# EAGLE board DigitalSandbox-Panel-v10 (EAGLE 6.5.0)
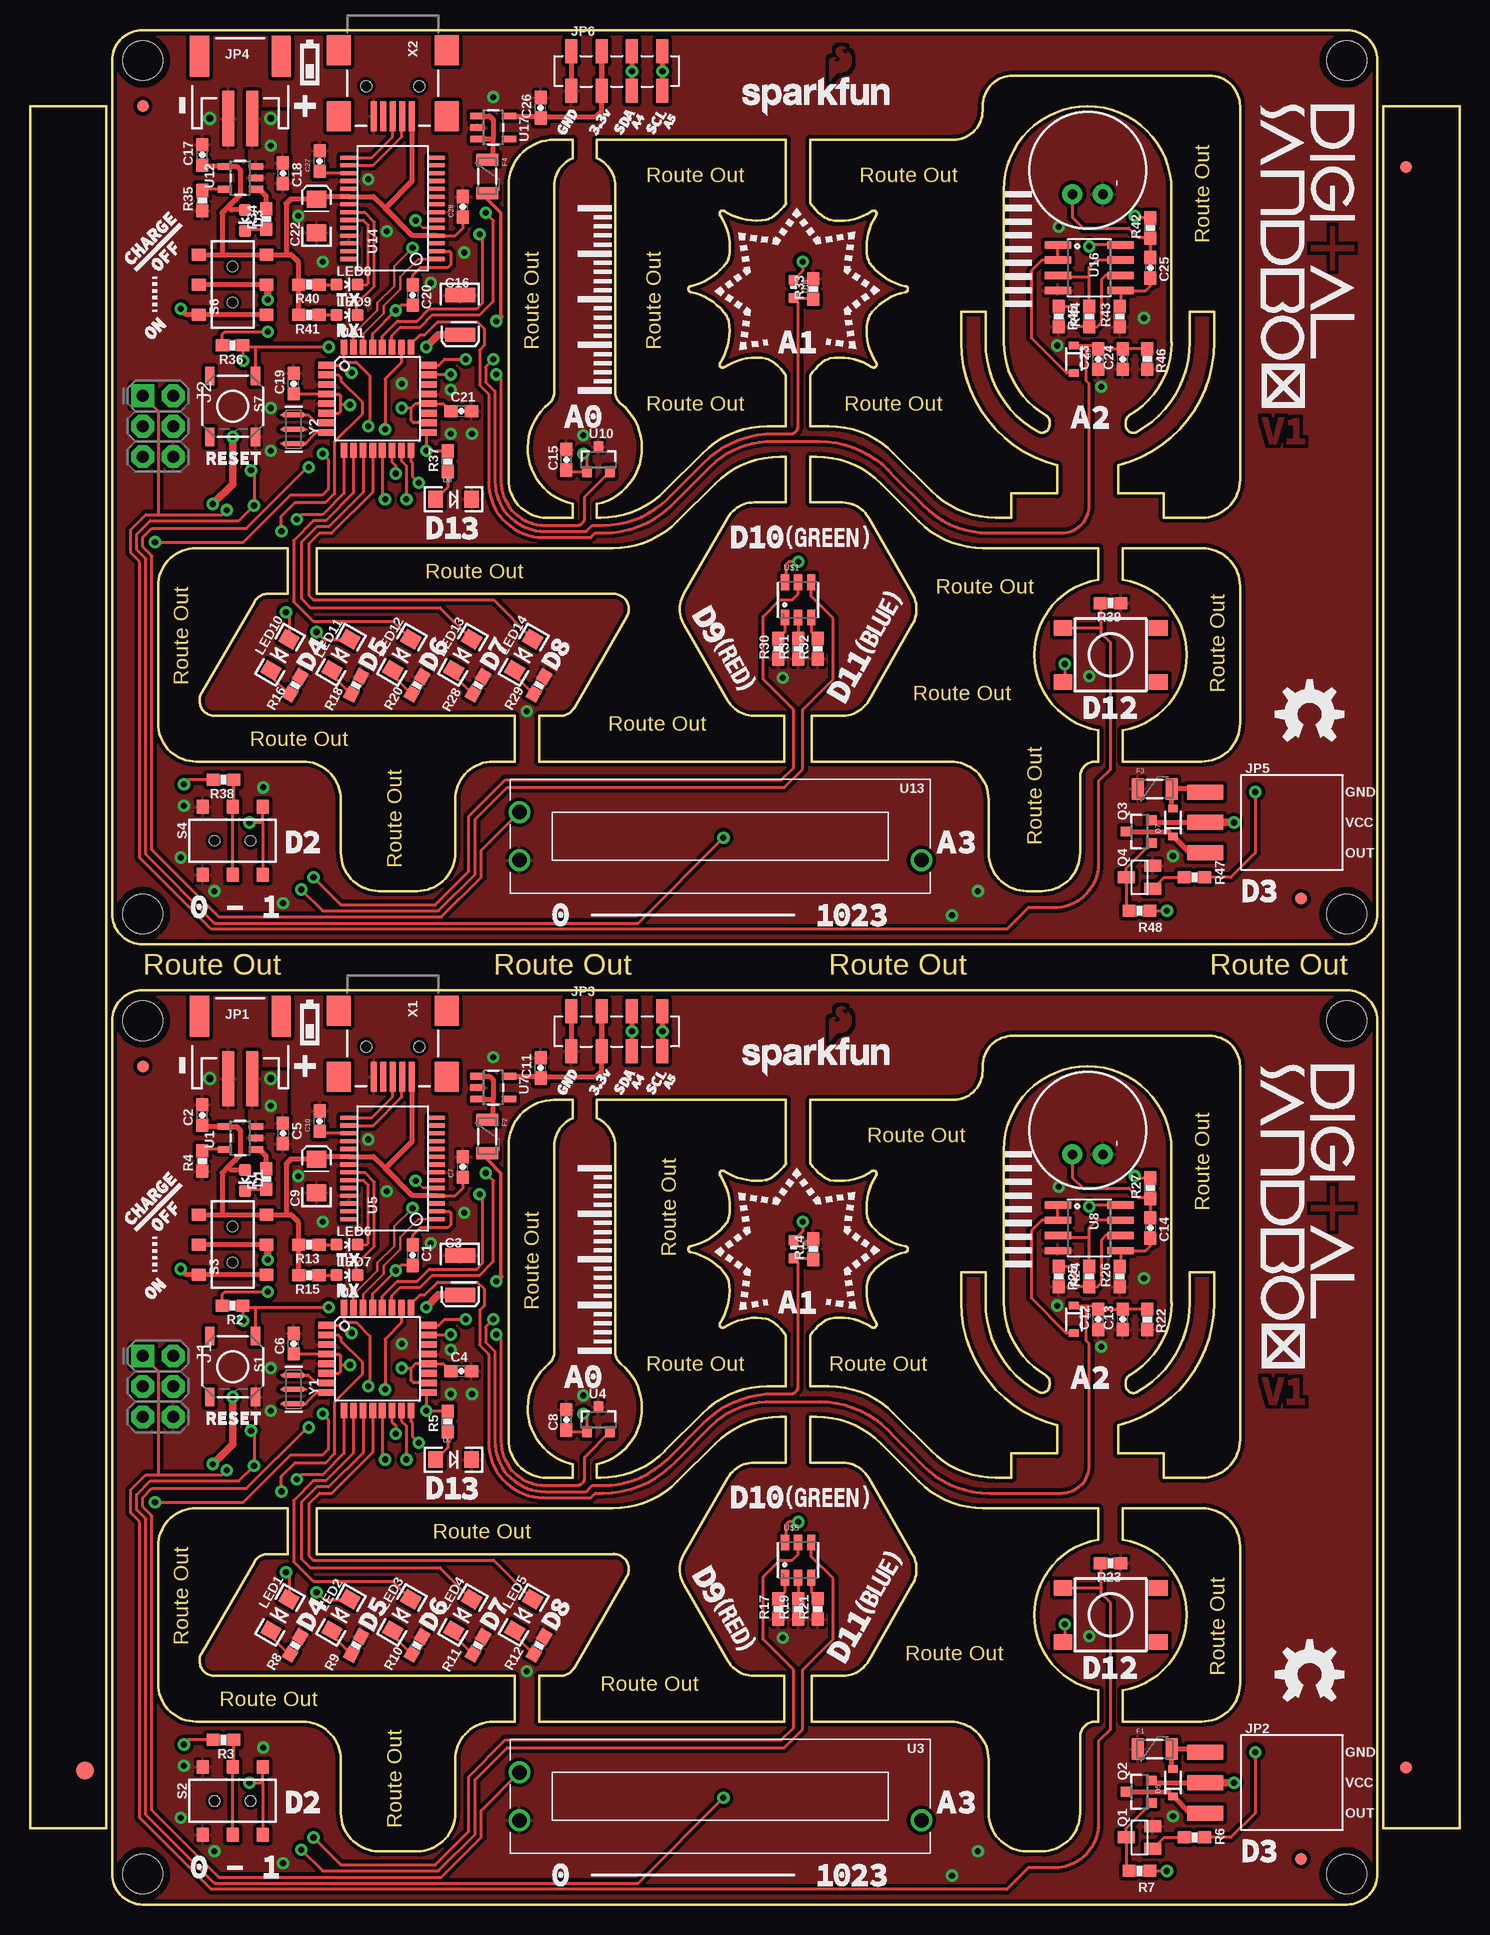
[diagram p0: board, top side]
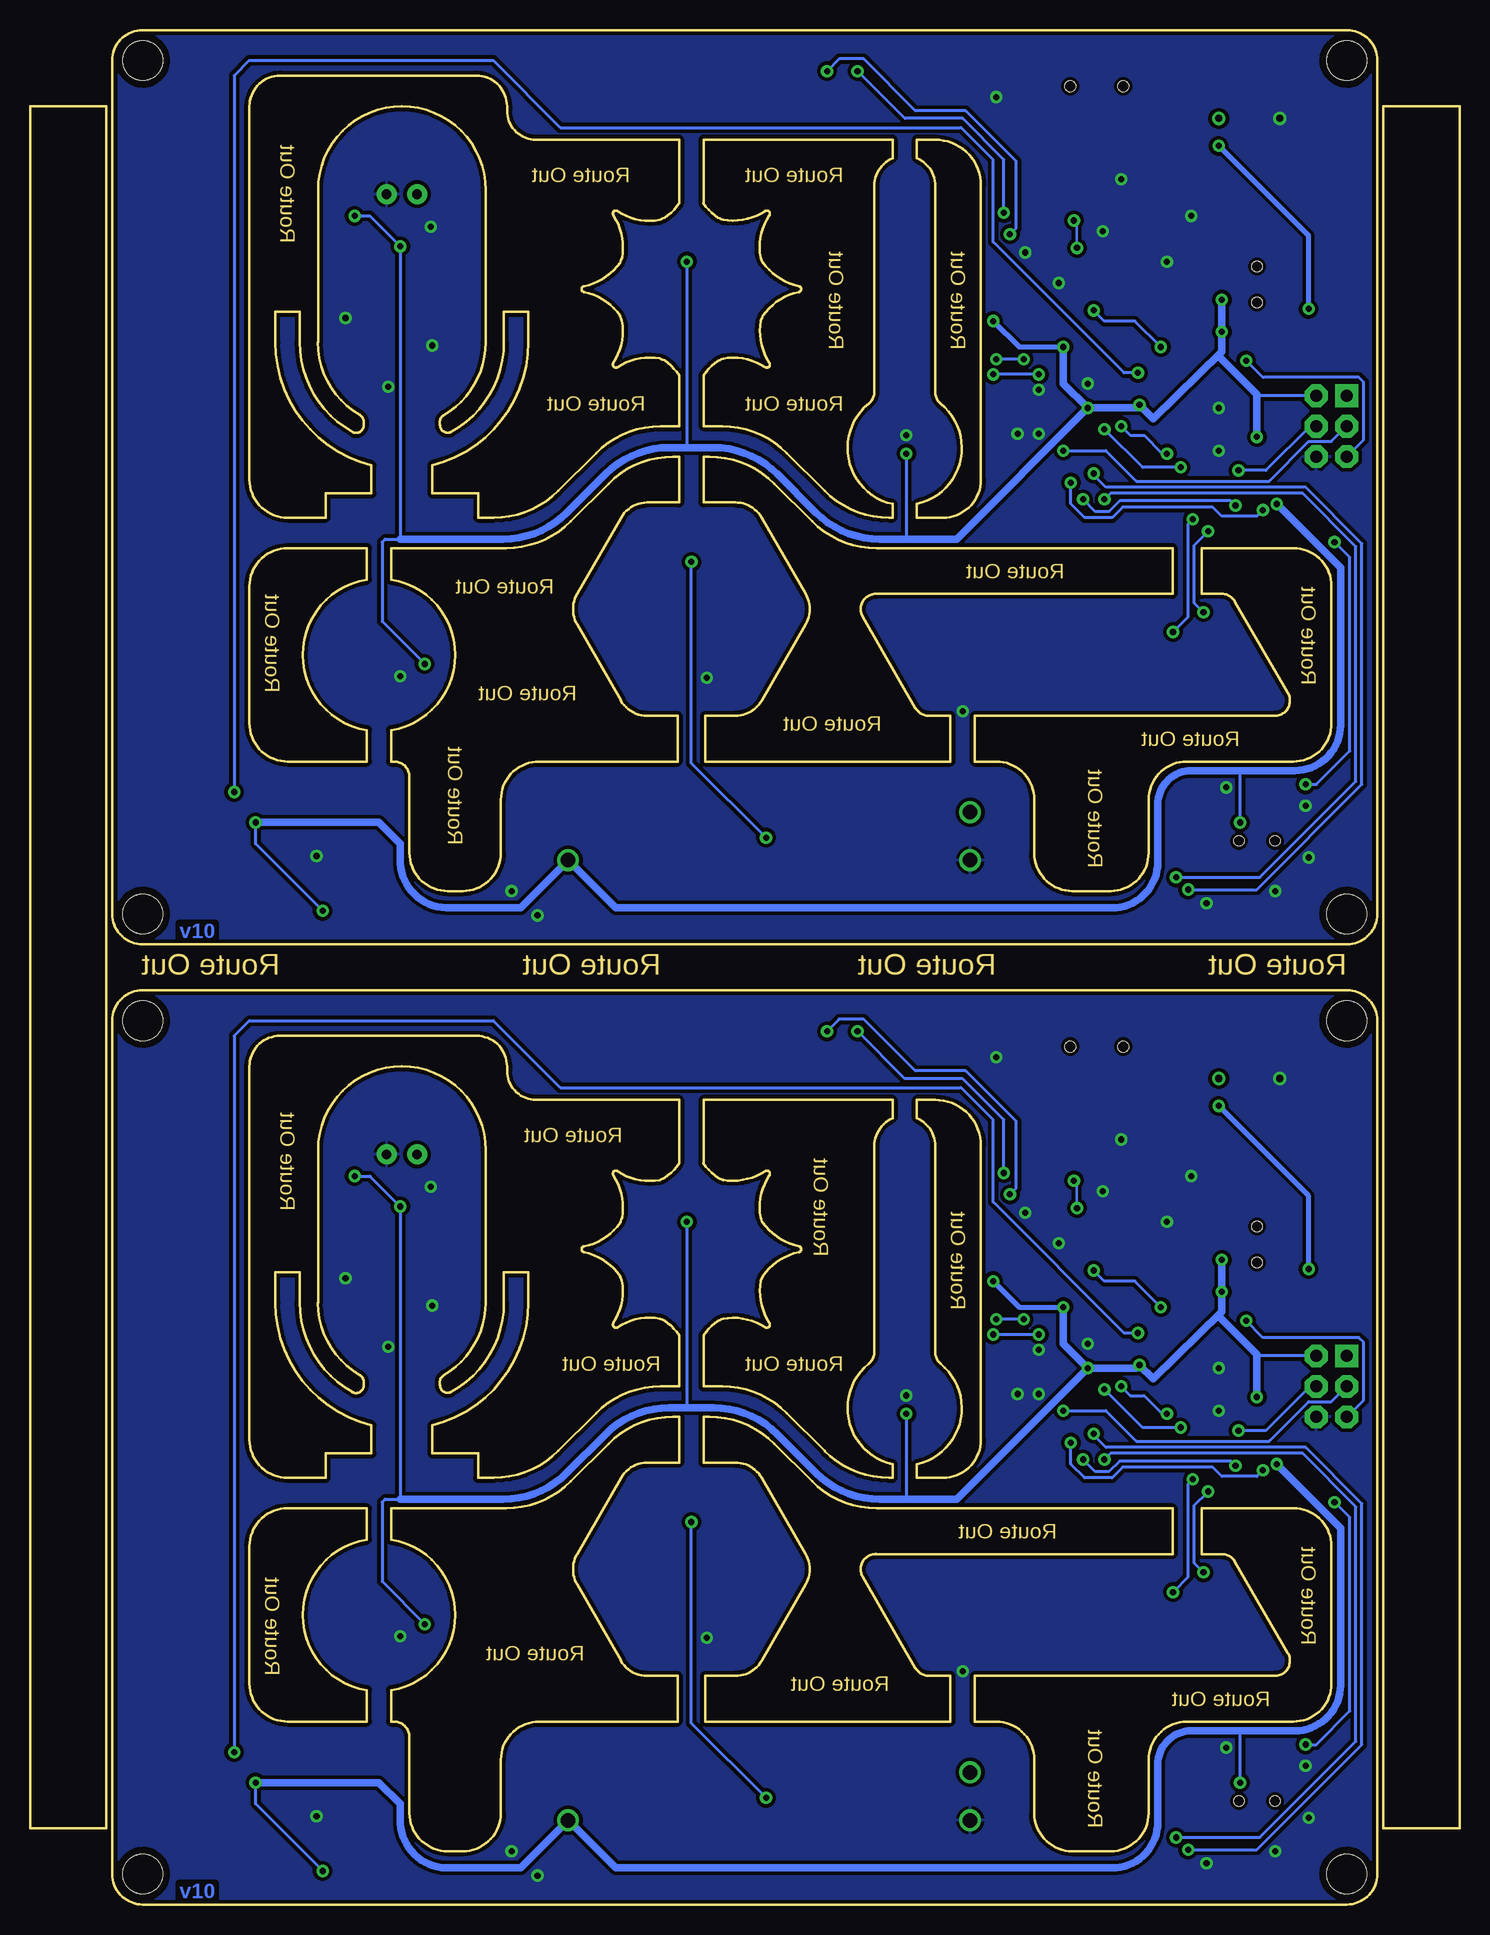
[diagram p1: board, bottom side, seen from below]

Size 119.13 x 156.21 mm. Coordinates in mm from the lower left corner, seen from the top.
Outline: 372 segments
Copper layers (1*16): Top 0.035mm / dielectric 1.5mm / Bottom 0.035mm
Design rules "SparkFun-2-layer": minimum track width 7mil, minimum drill 15mil, track to track 8mil, track to pad 8mil, pad to pad 8mil, via to via 8mil, smd to smd 8mil, copper to edge 8mil, drill to drill 8mil, minimum pad ring 12mil, minimum via ring 10mil, stop-mask expansion 4mil, vias tented up to drill 20mil, thermal gap 10mil
Net classes: 0 default: width 0.203 mm; 1 power: width 0.254 mm

## Footprints (pad centres in the part's own frame; a part is rotated, then mirrored left to right if it is on the bottom)
0603-CAP = smd 1.1 x 1: 1 -0.85,0; 2 0.85,0
EIA3528 = smd 1.2 x 2.5: A 1.65,0; C -1.65,0
EIA3216 = smd 1.4 x 1.6: A 1.4,0; C -1.4,0
LED-0603 = smd 1 x 1: A 0,-0.877; C 0,0.877
LED-1206 = smd 1.2 x 1.4: A -1.5,0; C 1.5,0
SOD-323 = smd 0.63 x 0.83: A 1.15,0; C -1.15,0
FIDUCIAL-1.5X3 = smd 1.5 x 1.5: 1 0,0
FIDUCIAL-1X2 = smd 1 x 1: 1 0,0
PTC-1206 = smd 1 x 1.8: 1 -1.4,0; 2 1.4,0
2X3-NS = drill 1.016 pad 1.88 square: 1 -2.54,-1.27 | drill 1.016 pad 1.88 octagon: 2 -2.54,1.27; 3 0,-1.27; 4 0,1.27; 5 2.54,-1.27; 6 2.54,1.27
JST-2-SMD = smd 1 x 4.6: 1 -1,-3.7; 2 1,-3.7 | smd 1.6 x 3.4: NC1 -3.4,1.5; NC2 3.4,1.5
1X03_SMD_RA_FEMALE = smd 1.25 x 3: 1 -2.54,7.225; 2 0,7.225; 3 2.54,7.225
1X04_SMD_STRAIGHT_COMBO = smd 1 x 2: 1 0,-1.65; 1-2 0,1.65; 2 2.54,1.65; 2-2 2.54,-1.65; 3 5.08,-1.65; 3-2 5.08,1.65; 4 7.62,1.65; 4-2 7.62,-1.65
SOT23 = smd 1 x 1.4: 1 -0.95,-1.1; 2 0.95,-1.1; 3 0,1.1
SOT23-3 = smd 0.8 x 0.9: 1 -0.95,-1; 2 0.95,-1; 3 0,1.1
0603-RES = smd 1.1 x 1: 1 -0.85,0; 2 0.85,0
TACTILE_SWITCH_SMD = smd 1.524 x 0.762: 1 -2.54,1.905; 2 2.54,1.905; 3 -2.54,-1.905; 4 2.54,-1.905
AYZ0202 = smd 1 x 1.15: 1 -2.5,2.825; 2 0,2.825; 3 2.5,2.825; 4 -2.5,-2.825; 5 0,-2.825; 6 2.5,-2.825 | hole 0.85: 1.5,0; -1.5,0
TACTILE_SWITCH_TALL = smd 1.55 x 1.3: A1 -3.975,-2.25; A2 3.975,-2.25; B1 -3.975,2.25; B2 3.975,2.25
STAND-OFF = hole 3.302: 0,0
SOT23-5 = smd 0.55 x 1.2: 1 -0.95,-1.3; 2 0,-1.3; 3 0.95,-1.3; 4 0.95,1.3; 5 -0.95,1.3
TQFP32-08 = smd 1.27 x 0.559: 1 -4.293,2.8; 2 -4.293,2; 3 -4.293,1.2; 4 -4.293,0.4; 5 -4.293,-0.4; 6 -4.293,-1.2; 7 -4.293,-2; 8 -4.293,-2.8; 17 4.293,-2.8; 18 4.293,-2; 19 4.293,-1.2; 20 4.293,-0.4; 21 4.293,0.4; 22 4.293,1.2; 23 4.293,2; 24 4.293,2.8 | smd 0.559 x 1.27: 9 -2.8,-4.293; 10 -2,-4.293; 11 -1.2,-4.293; 12 -0.4,-4.293; 13 0.4,-4.293; 14 1.2,-4.293; 15 2,-4.293; 16 2.8,-4.293; 25 2.8,4.293; 26 2,4.293; 27 1.2,4.293; 28 0.4,4.293; 29 -0.4,4.293; 30 -1.2,4.293; 31 -2,4.293; 32 -2.8,4.293
C2031N-1A2-B10K-GP = drill 1.2: 1 -16.75,2; 2 -16.75,-2; 3 16.75,-2
SSOP28DB = smd 0.348 x 1.397: 1 -4.225,-3.656; 2 -3.575,-3.656; 3 -2.925,-3.656; 4 -2.275,-3.656; 5 -1.625,-3.656; 6 -0.975,-3.656; 7 -0.325,-3.656; 8 0.325,-3.656; 9 0.975,-3.656; 10 1.625,-3.656; 11 2.275,-3.656; 12 2.925,-3.656; 13 3.575,-3.656; 14 4.225,-3.656; 15 4.225,3.656; 16 3.575,3.656; 17 2.925,3.656; 18 2.275,3.656; 19 1.625,3.656; 20 0.975,3.656; 21 0.325,3.656; 22 -0.325,3.656; 23 -0.975,3.656; 24 -1.625,3.656; 25 -2.275,3.656; 26 -2.925,3.656; 27 -3.575,3.656; 28 -4.225,3.656
ALS-PT19 = smd 0.8 x 0.8: C -0.75,0; E 0.75,0
SO08 = smd 0.61 x 2.21: 1 -1.905,-2.616; 2 -0.635,-2.616; 3 0.635,-2.616; 4 1.905,-2.616; 5 1.905,2.616; 6 0.635,2.616; 7 -0.635,2.616; 8 -1.905,2.616
MIC-9.7MM = drill 0.8 pad 1.676: 1 -2,1.27; 2 -2,-1.27
PLCC-6-LED = smd 0.7 x 1.3: AB -1.1,1.475; AG 1.1,1.475; AR 0,1.475; CB -1.1,-1.475; CG 1.1,-1.475; CR 0,-1.475
USB-MINIB = smd 2.5 x 0.5: D+ 2.5,0; D- 2.5,0.8; GND 2.5,-1.6; ID 2.5,-0.8; VBUS 2.5,1.6 | smd 2.5 x 2: MTN1 -3,4.5; MTN2 2.5,4.5; MTN3 -3,-4.5; MTN4 2.5,-4.5 | hole 0.9: 0,2.2; 0,-2.2
RESONATOR-SMD = smd 0.45 x 1.905: 1 -1.2,0; 2 0,0; 3 1.2,0

## Placement (x,y rotation side)
C1  0.1uF  [0603-CAP]  31.88,54.1 270 top
C2  4.7uF  [0603-CAP]  14.35,65.79 90 top
C3  47uF  [EIA3528]  35.85,52.45 270 top
C4  1.0uF  [0603-CAP]  35.94,44.45 0 top
C5  4.7uF  [0603-CAP]  21.08,64.26 270 top
C6  0.1uF  [0603-CAP]  21.97,46.74 90 top
C7  0.1uF  [0603-CAP]  36.07,61.47 90 top
C8  0.1uF  [0603-CAP]  44.7,40.39 90 top
C9  10uF  [EIA3216]  23.88,60.71 90 top
C10  0.1uF  [0603-CAP]  24.13,65.28 90 top
C11  0.1uF  [0603-CAP]  42.54,69.72 90 top
C12  0.1uF  [0603-CAP]  89.03,48.77 90 top
C13  0.1uF  [0603-CAP]  91.06,48.77 90 top
C14  0.1uF  [0603-CAP]  93.34,56.39 270 top
C15  0.1uF  [0603-CAP]  44.7,120.4 90 top
C16  47uF  [EIA3528]  35.85,132.46 270 top
C17  4.7uF  [0603-CAP]  14.35,145.8 90 top
C18  4.7uF  [0603-CAP]  21.08,144.27 270 top
C19  0.1uF  [0603-CAP]  21.97,126.75 90 top
C20  0.1uF  [0603-CAP]  31.88,134.11 270 top
C21  1.0uF  [0603-CAP]  35.94,124.46 0 top
C22  10uF  [EIA3216]  23.88,140.72 90 top
C23  0.1uF  [0603-CAP]  89.03,128.78 90 top
C24  0.1uF  [0603-CAP]  91.06,128.78 90 top
C25  0.1uF  [0603-CAP]  93.34,136.4 270 top
C26  0.1uF  [0603-CAP]  42.54,149.73 90 top
C27  0.1uF  [0603-CAP]  24.13,145.29 90 top
C28  0.1uF  [0603-CAP]  36.07,141.48 90 top
D1  Yellow  [LED-0603]  17.91,60.33 180 top
D2  RED  [LED-1206]  35.31,37.08 0 top
D3  Yellow  [LED-0603]  17.91,140.34 180 top
D4  [SOD-323]  87,48.77 270 top
D5  [SOD-323]  95.25,10.16 90 top
D6  [SOD-323]  87,128.78 270 top
D7  [SOD-323]  95.25,90.17 90 top
D8  RED  [LED-1206]  35.31,117.09 0 top
E$1  [FIDUCIAL-1.5X3]  4.57,11.18 0 top
E$2  [FIDUCIAL-1X2]  114.68,11.43 0 top
E$4  [FIDUCIAL-1X2]  114.68,144.78 180 top
F1  PTCSMD  [PTC-1206]  93.73,12.95 0 top
F2  PTCSMD  [PTC-1206]  38.1,64.01 270 top
F3  PTCSMD  [PTC-1206]  93.73,92.96 0 top
F4  PTCSMD  [PTC-1206]  38.1,144.02 270 top
FID1  FIDUCIAL1X2  [FIDUCIAL-1X2]  105.92,3.81 0 top
FID2  FIDUCIAL1X2  [FIDUCIAL-1X2]  9.4,69.85 0 top
FID3  FIDUCIAL1X2  [FIDUCIAL-1X2]  105.92,83.82 0 top
FID4  FIDUCIAL1X2  [FIDUCIAL-1X2]  9.4,149.86 0 top
J1  AVR_SPI_PRG_6NS  [2X3-NS]  10.67,43.18 270 top
J2  AVR_SPI_PRG_6NS  [2X3-NS]  10.67,123.19 270 top
JP1  LiPo  [JST-2-SMD]  17.53,72.52 0 top
JP2  [1X03_SMD_RA_FEMALE]  105.16,10.16 90 top
JP3  [1X04_SMD_STRAIGHT_COMBO]  45.08,72.77 0 top
JP4  LiPo  [JST-2-SMD]  17.53,152.53 0 top
JP5  [1X03_SMD_RA_FEMALE]  105.16,90.17 90 top
JP6  [1X04_SMD_STRAIGHT_COMBO]  45.08,152.78 0 top
LED1  White  [LED-1206]  20.83,24.13 240 top
LED2  White  [LED-1206]  25.91,24.13 240 top
LED3  White  [LED-1206]  30.99,24.13 240 top
LED4  White  [LED-1206]  36.07,24.13 240 top
LED5  White  [LED-1206]  41.15,24.13 240 top
LED6  Red  [LED-0603]  26.42,54.99 270 top
LED7  Green  [LED-0603]  26.42,52.45 270 top
LED8  Red  [LED-0603]  26.42,135 270 top
LED9  Green  [LED-0603]  26.42,132.46 270 top
LED10  White  [LED-1206]  20.83,104.14 240 top
LED11  White  [LED-1206]  25.91,104.14 240 top
LED12  White  [LED-1206]  30.99,104.14 240 top
LED13  White  [LED-1206]  36.07,104.14 240 top
LED14  White  [LED-1206]  41.15,104.14 240 top
Q1  MOSFET-N  [SOT23]  92.46,5.59 90 top
Q2  MOSFET-P  [SOT23-3]  92.46,9.4 90 top
Q3  MOSFET-P  [SOT23-3]  92.46,89.41 90 top
Q4  MOSFET-N  [SOT23]  92.46,85.6 90 top
R1  330  [0603-RES]  19.68,60.45 90 top
R2  10k  [0603-RES]  16.89,49.91 180 top
R3  10k  [0603-RES]  16.13,13.72 180 top
R4  10k  [0603-RES]  14.35,61.98 90 top
R5  330  [0603-RES]  34.8,40.26 90 top
R6  1k  [0603-RES]  97.03,5.59 0 top
R7  1k  [0603-RES]  92.46,2.79 180 top
R8  300  [0603-RES]  22.1,21.59 60 top
R9  300  [0603-RES]  27.18,21.59 62 top
R10  300  [0603-RES]  32.26,21.59 60 top
R11  300  [0603-RES]  37.34,21.59 60 top
R12  300  [0603-RES]  42.42,21.59 60 top
R13  1k  [0603-RES]  23.24,54.99 180 top
R14  10k  [0603-RES]  65.28,54.61 90 top
R15  1k  [0603-RES]  23.24,52.45 180 top
R16  300  [0603-RES]  22.1,101.6 60 top
R17  300  [0603-RES]  62.36,24.64 90 top
R18  300  [0603-RES]  27.18,101.6 62 top
R19  100  [0603-RES]  64.01,24.64 90 top
R20  300  [0603-RES]  32.26,101.6 60 top
R21  100  [0603-RES]  65.66,24.64 90 top
R22  100k  [0603-RES]  93.09,48.77 270 top
R23  10k  [0603-RES]  90.04,28.45 180 top
R24  10k  [0603-RES]  88.27,52.32 90 top
R25  2.2k  [0603-RES]  85.73,52.32 270 top
R26  10k  [0603-RES]  90.81,52.32 90 top
R27  10k  [0603-RES]  93.34,59.69 90 top
R28  300  [0603-RES]  37.34,101.6 60 top
R29  300  [0603-RES]  42.42,101.6 60 top
R30  300  [0603-RES]  62.36,104.65 90 top
R31  100  [0603-RES]  64.01,104.65 90 top
R32  100  [0603-RES]  65.66,104.65 90 top
R33  10k  [0603-RES]  65.28,134.62 90 top
R34  330  [0603-RES]  19.68,140.46 90 top
R35  10k  [0603-RES]  14.35,141.99 90 top
R36  10k  [0603-RES]  16.89,129.92 180 top
R37  330  [0603-RES]  34.8,120.27 90 top
R38  10k  [0603-RES]  16.13,93.73 180 top
R39  10k  [0603-RES]  90.04,108.46 180 top
R40  1k  [0603-RES]  23.24,135 180 top
R41  1k  [0603-RES]  23.24,132.46 180 top
R42  10k  [0603-RES]  93.34,139.7 90 top
R43  10k  [0603-RES]  90.81,132.33 90 top
R44  10k  [0603-RES]  88.27,132.33 90 top
R45  2.2k  [0603-RES]  85.73,132.33 270 top
R46  100k  [0603-RES]  93.09,128.78 270 top
R47  1k  [0603-RES]  97.03,85.6 0 top
R48  1k  [0603-RES]  92.46,82.8 180 top
S1  Reset  [TACTILE_SWITCH_SMD]  16.89,44.83 270 top
S2  [AYZ0202]  16.89,8.64 0 top
S3  On/Off  [AYZ0202]  16.89,54.99 90 top
S4  [AYZ0202]  16.89,88.65 0 top
S5  SWITCH-MOMENTARY-2SMD-4  [TACTILE_SWITCH_TALL]  90.04,24.13 180 top
S6  On/Off  [AYZ0202]  16.89,135 90 top
S7  Reset  [TACTILE_SWITCH_SMD]  16.89,124.84 270 top
S8  SWITCH-MOMENTARY-2SMD-4  [TACTILE_SWITCH_TALL]  90.04,104.14 180 top
STANDOFF1  STAND-OFF  [STAND-OFF]  109.73,73.66 0 top
STANDOFF2  STAND-OFF  [STAND-OFF]  109.73,2.54 0 top
STANDOFF3  STAND-OFF  [STAND-OFF]  9.4,2.54 0 top
STANDOFF4  STAND-OFF  [STAND-OFF]  9.4,73.66 0 top
STANDOFF5  STAND-OFF  [STAND-OFF]  9.4,153.67 0 top
STANDOFF6  STAND-OFF  [STAND-OFF]  9.4,82.55 0 top
STANDOFF7  STAND-OFF  [STAND-OFF]  109.73,82.55 0 top
STANDOFF8  STAND-OFF  [STAND-OFF]  109.73,153.67 0 top
U1  MCP73831  [SOT23-5]  17.53,63.88 90 top
U2  ATMEGA328  [TQFP32-08]  28.96,45.47 0 top
U3  C2031N-1A2-B10K-GP  [C2031N-1A2-B10K-GP]  57.53,9.02 0 top
U4  MCP9700  [SOT23-3]  47.37,40.39 0 top
U5  FT232RLSSOP  [SSOP28DB]  30.23,61.34 90 top
U6  LIGHTSENSORALS  [ALS-PT19]  63.63,54.61 270 top
U7  V_REG_LDOSMD  [SOT23-5]  38.61,68.07 270 top
U8  LMV358SOIC  [SO08]  88.27,56.39 270 top
U9  MIC9.7MM  [MIC-9.7MM]  88.14,64.52 90 top
U10  MCP9700  [SOT23-3]  47.37,120.4 0 top
U11  ATMEGA328  [TQFP32-08]  28.96,125.48 0 top
U12  MCP73831  [SOT23-5]  17.53,143.89 90 top
U13  C2031N-1A2-B10K-GP  [C2031N-1A2-B10K-GP]  57.53,89.03 0 top
U14  FT232RLSSOP  [SSOP28DB]  30.23,141.35 90 top
U15  MIC9.7MM  [MIC-9.7MM]  88.14,144.53 90 top
U16  LMV358SOIC  [SO08]  88.27,136.4 270 top
U17  V_REG_LDOSMD  [SOT23-5]  38.61,148.08 270 top
U18  LIGHTSENSORALS  [ALS-PT19]  63.63,134.62 270 top
U$1  LED-TRICOLOR-SMDPLCC-6-SMD  [PLCC-6-LED]  64.01,108.71 0 top
U$5  LED-TRICOLOR-SMDPLCC-6-SMD  [PLCC-6-LED]  64.01,28.7 0 top
X1  USBSMD  [USB-MINIB]  30.23,71.5 270 top
X2  USBSMD  [USB-MINIB]  30.23,151.51 270 top
Y1  8MHz  [RESONATOR-SMD]  21.97,42.93 270 top
Y2  8MHz  [RESONATOR-SMD]  21.97,122.94 270 top

## Library data of the parts
C1 C6-C8 C10-C15 C19 C20 C23-C28 = SparkFun-Capacitors; PROD_ID: CAP-00810
C2 C5 C17 C18 = SparkFun-Capacitors; PROD_ID: CAP-08280
C3 C16 = SparkFun-Capacitors; PROD_ID: CAP-08310
C4 C21 JP1 JP4 U4 U10 = SparkFun
C9 C22 = SparkFun-Capacitors; PROD_ID: CAP-00811
D1 D3 = SparkFun-LED; PROD_ID: DIO-09003
D2 D8 = SparkFun-LED; PROD_ID: DIO-00809
D4-D7 = SparkFun-DiscreteSemi; PROD_ID: DIO-09646
E$1 = SparkFun-Retired
E$2 E$4 FID1-FID4 = SparkFun-Aesthetics
F1-F4 = SparkFun-PowerIC; PROD_ID: RES-11150
J1 J2 JP3 JP6 = SparkFun-Connectors
JP2 JP5 = SparkFun-Connectors; PROD_ID: CONN-10926; VALUE: 1x3 RA Female .1"
LED1-LED5 LED10-LED14 = SparkFun-LED; PROD_ID: DIO-09955; VALUE: WHITE
LED6 LED8 = SparkFun-LED; PROD_ID: DIO-00819; VALUE: RED
LED7 LED9 = SparkFun-LED; PROD_ID: DIO-00821; VALUE: GREEN
Q1 Q4 = SparkFun-DiscreteSemi; PROD_ID: TRANS-00830
Q2 Q3 = SparkFun-DiscreteSemi; PROD_ID: TRANS-08285
R1 R5 R34 R37 = SparkFun-Resistors; PROD_ID: RES-00818
R2-R4 R14 R23 R24 R26 R27 R33 R35 R36 R38 R39 R42-R44 = SparkFun-Resistors; PROD_ID: RES-00824; VALUE: 10K
R6 R7 R13 R15 R40 R41 R47 R48 = SparkFun-Resistors; PROD_ID: RES-07856; VALUE: 1K
R8-R12 R16-R18 R20 R28-R30 = SparkFun-Resistors; PROD_ID: RES_10328
R19 R21 R31 R32 = SparkFun-Resistors; PROD_ID: RES-07863
R22 R46 = SparkFun-Resistors; PROD_ID: RES-07828
R25 R45 = SparkFun-Resistors; PROD_ID: RES-08272
S1 S7 = SparkFun-Electromechanical; PROD_ID: SWCH-08247
S2-S4 S6 = SparkFun-Electromechanical; PROD_ID: SWCH-08179; VALUE: DPDT
S5 S8 = SparkFun-Electromechanical; PROD_ID: SWCH-11966
STANDOFF1-STANDOFF8 = SparkFun-Electromechanical
U1 U12 = SparkFun-PowerIC; PROD_ID: IC-09995
U2 U11 = SparkFun-DigitalIC; PROD_ID: IC-09069; VALUE: ATMEGA328P
U3 U13 = C2031N-1A2-B10K-GP
U5 U14 = SparkFun-DigitalIC; PROD_ID: IC-00870
U6 U18 = SparkFun-Sensors; PROD_ID: IC-11836
U7 U17 = SparkFun-PowerIC
U8 U16 = SparkFun-AnalogIC; PROD_ID: IC-09657
U9 U15 = SparkFun-Sensors; PROD_ID: COMP-08856
U$1 U$5 = Testing
X1 X2 = SparkFun-Connectors; PROD_ID: CONN-08193
Y1 Y2 = SparkFun-FreqCtrl; PROD_ID: XTAL-08895; VALUE: 8MHZ

## Nets
3.3V [power]: C10.1 U5.17
3.3V1 [power]: C27.1 U14.17
5V: C2.1 C7.1 C9.A D1.A R13.2 R15.2 S3.3 S3.6 U1.4 U5.4 U5.20 X1.VBUS
5V1: C17.1 C22.A C28.1 D3.A R40.2 R41.2 S6.3 S6.6 U12.4 U14.4 U14.20 X2.VBUS
A0: U2.23 U4.2
A1: R14.1 U2.24 U6.E
A2: C12.2 C13.2 D4.C R22.1 U2.25
A3: U2.26 U3.1
A4: JP3.3 U2.27
A5: JP3.4 U2.28
A6: C23.2 C24.2 D6.C R46.1 U11.25
A7: U11.26 U13.1
A8: JP6.3 U11.27
A9: JP6.4 U11.28
A10: U10.2 U11.23
A11: R33.1 U11.24 U18.E
BLUE: R17.2 U$5.CB
BLUE1: R30.2 U$1.CB
CTS: U5.11
CTS1: U14.11
D1: J2.4 U11.15 U$1.AB
D2: R3.2 U2.32
D3: R6.2 U2.1
D4: LED1.A U2.2
D5: LED2.A U2.9
D6: LED3.A U2.10
D7: LED4.A U2.11
D8: LED5.A U2.12
D9: U2.13 U$5.AR
D10: U2.14 U$5.AG
D11: J1.4 U2.15 U$5.AB
D12: J1.1 R23.2 S5.A2 U2.16
D13: J1.3 R5.2 U2.17
D14: J2.3 R37.2 U11.17
D15: LED11.A U11.9
D16: U11.13 U$1.AR
D17: LED12.A U11.10
D18: U11.14 U$1.AG
D19: R38.2 U11.32
D20: R47.2 U11.1
D21: LED10.A U11.2
D22: LED14.A U11.12
D23: LED13.A U11.11
D24: J2.1 R39.2 S8.A2 U11.16
DTR: C1.1 U5.2
DTR1: C20.1 U14.2
GND [power]: C2.2 C3.C C4.2 C5.2 C6.2 C7.2 C8.2 C9.C C10.2 C11.2 C12.1 C13.1 D2.C F1.1 J1.6 JP1.1 JP3.1 Q1.2 R4.1 R8.2 R9.2 R10.2 R11.2 R12.2 R14.2 R17.1 R19.1 R21.1 R22.2 R23.1 R25.2 R26.1 S1.2 S2.1 S2.4 U1.2 U2.3 U2.5 U2.21 U3.2 U4.3 U5.7 U5.18 U5.21 U5.25 U5.26 U7.2 U8.4 U9.2 X1.GND Y1.2
GND1 [power]: C15.2 C16.C C17.2 C18.2 C19.2 C21.2 C22.C C23.1 C24.1 C26.2 C27.2 C28.2 D8.C F3.1 J2.6 JP4.1 JP6.1 Q4.2 R16.2 R18.2 R20.2 R28.2 R29.2 R30.1 R31.1 R32.1 R33.2 R35.1 R39.1 R43.1 R45.2 R46.2 S4.1 S4.4 S7.2 U10.3 U11.3 U11.5 U11.21 U12.2 U13.2 U14.7 U14.18 U14.21 U14.25 U14.26 U15.2 U16.4 U17.2 X2.GND Y2.2
GRN: R21.2 U$5.CG
GRN1: R32.2 U$1.CG
N$1: U2.7 Y1.1
N$2: D2.A R5.1
N$3: U2.8 Y1.3
N$4: Q1.3 Q2.1 R7.2
N$5: LED6.A R13.1
N$6: LED7.A R15.1
N$7 [power]: F2.1 U7.1 U7.3
N$8: D5.C JP2.1 Q2.3
N$9: LED3.C R10.1
N$10: Q1.1 R6.1
N$11: LED4.C R11.1
N$12: C11.1 JP3.2 U7.5
N$13: LED5.C R12.1
N$15: R3.1 S2.2 S2.5
N$16 [power]: D5.A F1.2 JP2.3
N$17: C14.1 R27.1 U9.1
N$18: LED1.C R8.1
N$20: C14.2 R26.2 U8.5
N$21: LED2.C R9.1
N$23: R24.1 R25.1 U8.6
N$24: D4.A U8.1 U8.2
N$25: LED10.C R16.1
N$26: R24.2 U8.3 U8.7
N$27: LED11.C R18.1
N$28: D8.A R37.1
N$29: U11.7 Y2.1
N$31: U11.8 Y2.3
N$32: D3.C R34.1
N$33: D1.C R1.1
N$34: LED12.C R20.1
N$35: LED13.C R28.1
N$36: LED14.C R29.1
N$37: R38.1 S4.2 S4.5
N$38: LED8.A R40.1
N$39: LED9.A R41.1
N$40: C25.1 R42.1 U15.1
N$41: C25.2 R43.2 U16.5
N$42: R44.1 R45.1 U16.6
N$43: D6.A U16.1 U16.2
N$44: R44.2 U16.3 U16.7
N$45: D7.C JP5.1 Q3.3
N$46: Q3.1 Q4.3 R48.2
N$47: Q4.1 R47.1
N$48: C26.1 JP6.2 U17.5
N$49 [power]: F4.1 U17.1 U17.3
N$50 [power]: D7.A F3.2 JP5.3
PROG: R4.2 U1.5
PROG1: R35.2 U12.5
RED: R19.2 U$5.CR
RED1: R31.2 U$1.CR
RST: C1.2 J1.5 R2.1 S1.1 U2.29
RST1: C20.2 J2.5 R36.1 S7.1 U11.29
RXD: U2.30 U5.1
RXD1: U11.30 U14.1
RXLED: LED7.C U5.22
RXLED1: LED9.C U14.22
STAT: R1.2 U1.1
STAT1: R34.2 U12.1
TXD: U2.31 U5.5
TXD1: U11.31 U14.5
TXLED: LED6.C U5.23
TXLED1: LED8.C U14.23
USB_D+: U5.15 X1.D+
USB_D+1: U14.15 X2.D+
USB_D-: U5.16 X1.D-
USB_D-1: U14.16 X2.D-
VBATT: C5.1 JP1.2 S3.1 S3.4 U1.3
VBATT1: C18.1 JP4.2 S6.1 S6.4 U12.3
VCC [power]: C3.A C4.1 C6.1 C8.1 F2.2 J1.2 JP2.2 Q2.2 R2.2 R7.1 R27.2 S2.3 S2.6 S3.2 S3.5 S5.B2 U2.4 U2.6 U2.18 U2.20 U3.3 U4.1 U6.C U8.8
VCC1 [power]: C15.1 C16.A C19.1 C21.1 F4.2 J2.2 JP5.2 Q3.2 R36.2 R42.2 R48.1 S4.3 S4.6 S6.2 S6.5 S8.B2 U10.1 U11.4 U11.6 U11.18 U11.20 U13.3 U16.8 U18.C

## Tracks (layer width: path | path; a pad name or v marks a point on that pad's centre or on a via)
3.3V
  Top 0.254: U5.17 24.13,64.27 C10.1 24.13,64.52
3.3V1
  Top 0.254: U14.17 24.13,144.28 C27.1 24.13,144.53
5V
  Top 0.254: U5.4 35.44,59.07 36.07,59.69 C7.1
  Top 0.406: C2.1 14.35,64.83 U1.4 17.21,64.83 17.53,64.52 17.53,62.48 16.51,61.47 | D1.A 16.78,61.2 16.51,61.47 | R15.2 R13.2 22.35,55.03 22.35,56.9 21.76,57.49 21.34,57.49 | 21.34,57.49 21.34,61.72 21.72,62.11 C9.A 24.09,62.32 U5.20 28.62,62.32 29.59,61.34 | 16.51,61.47 16,60.96 16,57.49 | X1.VBUS 31.83,63.58 29.59,61.34 | U5.4 31.87,59.07 29.59,61.34 | 21.34,57.49 S3.6 16,57.49 | S3.3 16,57.49
5V1
  Top 0.254: U14.4 35.44,139.08 36.07,139.7 C28.1
  Top 0.406: C17.1 14.35,144.84 U12.4 17.21,144.84 17.53,144.53 17.53,142.49 16.51,141.48 | D3.A 16.78,141.21 16.51,141.48 | R41.2 R40.2 22.35,135.04 22.35,136.91 21.76,137.5 21.34,137.5 | 21.34,137.5 21.34,141.73 21.72,142.12 C22.A 24.09,142.33 U14.20 28.62,142.33 29.59,141.35 | 16.51,141.48 16,140.97 16,137.5 | X2.VBUS 31.83,143.59 29.59,141.35 | U14.4 31.87,139.08 29.59,141.35 | 21.34,137.5 S6.6 16,137.5 | S6.3 16,137.5
A0  (via drill 0.51)
  Top 0.254: U2.23 33.28,47.5 v35.05,47.5 | v38.86,47.5 39.24,47.12 39.24,38.61 arc90 42.93,34.92 45.59,34.92 arc90 46.23,35.56 46.23,37.29 U4.2
  Bottom 0.254: v35.05,47.5 v38.86,47.5
A1  (via drill 0.51)
  Top 0.254: R14.1 65.18,53.86 U6.E 64.01,53.48 64.01,43.18 arc-90 63.37,42.55 61.34,42.55 arc40 56.13,40.13 53.09,37.08 arc-44 47.75,34.92 46.86,34.92 46.35,34.42 42.93,34.42 arc-90 38.73,38.61 38.73,46.1 37.97,46.86 37.97,48.13 v38.61,48.77 | U2.24 34.04,48.27 34.54,48.77 v36.32,48.77
  Bottom 0.254: v36.32,48.77 v38.61,48.77
A2
  Top 0.254: R22.1 C13.2 C12.2 arc90 88.73,49.92 88.01,49.92 | U2.25 31.76,50.04 32.51,50.8 32.89,50.8 33.96,51.87 37.29,51.87 37.85,51.31 37.85,49.91 37.46,49.53 37.46,46.61 38.23,45.85 38.23,38.48 arc90 42.8,33.91 46.74,33.91 47.12,34.29 47.75,34.29 arc47 53.85,36.96 56.77,39.88 arc-42 61.34,41.91 65.79,41.91 arc-50 72.01,38.99 74.42,36.58 arc45 79.88,34.29 85.98,34.29 arc90 88.27,36.58 88.27,46.74 88.01,46.99 88.01,49.92 | D4.C 88.01,49.92
A3  (via drill 0.51)
  Top 0.254: U2.26 30.96,48.48 29.59,47.12 v29.59,42.93 | v23.24,39.75 23.11,39.75 18.03,34.67 10.16,34.67 9.4,33.91 9.4,33.15 10.16,32.38 10.16,7.87 15.75,2.29 34.29,2.29 37.59,5.59 37.59,7.83 U3.1
  Bottom 0.254: v29.59,42.93 26.42,39.75 v23.24,39.75 | 41.31,11.02 U3.1
A4  (via drill 0.51)
  Top 0.254: U2.27 30.16,50.73 30.86,51.44 32.51,51.44 33.53,52.45 37.46,52.45 38.61,53.59 38.61,60.33 v37.97,60.96 | v50.16,72.77 JP3.3
  Bottom 0.254: v37.97,60.96 37.97,65.41 41.4,68.83 46.23,68.83 v50.16,72.77
A5  (via drill 0.51)
  Top 0.254: U2.28 29.36,50.69 30.61,51.94 32.26,51.94 33.27,52.96 37.21,52.96 37.72,53.47 37.72,58.93 v37.46,59.18 | v52.7,72.77 52.7,74.3 52.83,74.42 | JP3.4 52.83,74.42 | 52.83,74.42
  Bottom 0.254: v37.46,59.18 36.96,59.69 36.96,65.28 41.15,69.47 45.34,69.47 49.66,73.79 51.69,73.79 v52.7,72.77
A6
  Top 0.254: R46.1 C24.2 C23.2 arc90 88.73,129.93 88.01,129.93 | U11.25 31.76,130.05 32.51,130.81 32.89,130.81 33.96,131.88 37.29,131.88 37.85,131.32 37.85,129.92 37.46,129.54 37.46,126.62 38.23,125.86 38.23,118.49 arc90 42.8,113.92 46.74,113.92 47.12,114.3 47.75,114.3 arc47 53.85,116.97 56.77,119.89 arc-42 61.34,121.92 65.79,121.92 arc-50 72.01,119 74.42,116.59 arc45 79.88,114.3 85.98,114.3 arc90 88.27,116.59 88.27,126.75 88.01,127 88.01,129.93 | D6.C 88.01,129.93
A7  (via drill 0.51)
  Top 0.254: U11.26 30.96,128.49 29.59,127.13 v29.59,122.94 | v23.24,119.76 23.11,119.76 18.03,114.68 10.16,114.68 9.4,113.92 9.4,113.16 10.16,112.39 10.16,87.88 15.75,82.3 34.29,82.3 37.59,85.6 37.59,87.84 U13.1
  Bottom 0.254: v29.59,122.94 26.42,119.76 v23.24,119.76 | 41.31,91.03 U13.1
A8  (via drill 0.51)
  Top 0.254: U11.27 30.16,130.74 30.86,131.44 32.51,131.44 33.53,132.46 37.46,132.46 38.61,133.6 38.61,140.34 v37.97,140.97 | v50.16,152.78 JP6.3
  Bottom 0.254: v37.97,140.97 37.97,145.41 41.4,148.84 46.23,148.84 v50.16,152.78
A9  (via drill 0.51)
  Top 0.254: U11.28 29.36,130.7 30.61,131.95 32.26,131.95 33.27,132.97 37.21,132.97 37.72,133.48 37.72,138.94 v37.46,139.19 | v52.7,152.78 52.7,154.31 52.83,154.43 | JP6.4 52.83,154.43 | 52.83,154.43
  Bottom 0.254: v37.46,139.19 36.96,139.7 36.96,145.29 41.15,149.48 45.34,149.48 49.66,153.8 51.69,153.8 v52.7,152.78
A10  (via drill 0.51)
  Top 0.254: U11.23 33.28,127.51 v35.05,127.51 | v38.86,127.51 39.24,127.13 39.24,118.62 arc90 42.93,114.94 45.59,114.94 arc90 46.23,115.57 46.23,117.3 U10.2
  Bottom 0.254: v35.05,127.51 v38.86,127.51
A11  (via drill 0.51)
  Top 0.254: R33.1 65.18,133.87 U18.E 64.01,133.49 64.01,123.19 arc-90 63.37,122.56 61.34,122.56 arc40 56.13,120.14 53.09,117.09 arc-44 47.75,114.94 46.86,114.94 46.35,114.43 42.93,114.43 arc-90 38.73,118.62 38.73,126.11 37.97,126.87 37.97,128.14 v38.61,128.78 | U11.24 34.04,128.28 34.54,128.78 v36.32,128.78
  Bottom 0.254: v36.32,128.78 v38.61,128.78
BLUE
  Top 0.254: U$5.CB 62.91,26.04 R17.2
BLUE1
  Top 0.254: U$1.CB 62.91,106.05 R30.2
D1  (via drill 0.51)
  Top 0.254: U11.15 30.96,120.3 31.37,119.89 v31.37,117.09 | v18.41,119.51 18.67,119.25 v18.67,116.59 17.4,115.32 10.03,115.32 8.89,114.17 8.89,112.9 9.65,112.14 9.65,87.5 15.37,81.79 50.67,81.79 v57.78,88.9 | v64.01,111.89 63.25,111.89 62.99,111.63 62.99,110.23 U$1.AB
  Bottom 0.254: v18.67,116.59 19.05,116.97 28.32,116.97 29.21,116.08 30.35,116.08 v31.37,117.09 | J2.4 12.45,123.19 16.13,119.51 v18.41,119.51 | v57.78,88.9 64.01,95.12 v64.01,111.89
D2  (via drill 0.51)
  Top 0.254: U2.32 26.16,48.77 26.42,48.51 27.18,48.51 28.32,47.37 28.32,43.31 v28.19,43.18 | R3.2 13.21,13.72 v12.83,13.34 | v10.41,33.53 17.78,33.53 21.72,37.47 24.38,37.47 24.89,37.97 24.89,40.39 v24.38,40.89
  Bottom 0.254: v28.19,43.18 27.43,42.42 26.29,42.42 24.77,40.89 v24.38,40.89 | v12.83,13.34 11.94,13.34 9.14,16.13 9.14,32.26 v10.41,33.53
D3  (via drill 0.51)
  Top 0.254: U2.1 25.78,48.26 26.42,47.62 v26.8,47.62 | v102.11,12.7 102.11,7.62 100.08,5.59 R6.2
  Bottom 0.254: v26.8,47.62 27.94,47.62 38.86,58.55 38.86,65.41 41.53,68.07 74.93,68.07 80.52,73.66 100.84,73.66 102.11,72.39 v102.11,12.7
D4  (via drill 0.51)
  Top 0.254: U2.2 25.69,47.47 25.91,47.24 25.91,46.99 27.69,45.21 27.69,44.2 25.4,41.91 25.4,37.59 24.64,36.83 22.1,36.83 20.95,35.69 v20.95,34.42 | v21.34,27.69 21.59,27.43 21.59,25.42 | LED1.A 21.59,25.42 | 21.59,25.42 21.59,25.4
  Bottom 0.254: v21.34,27.69 22.1,28.45 22.1,33.27 v20.95,34.42
D5  (via drill 0.51)
  Top 0.254: U2.9 26.16,37.59 24.38,35.81 22.61,35.81 v22.23,35.43 | v23.88,26.04 24.51,25.4 26.67,25.4 26.67,25.42 LED2.A
  Bottom 0.254: v23.88,26.04 22.61,27.3 22.61,35.05 v22.23,35.43
D6
  Top 0.254: U2.10 26.96,37.62 24.64,35.31 23.62,35.31 21.97,33.66 21.97,28.57 23.62,26.92 30.24,26.92 LED3.A
D7
  Top 0.254: U2.11 27.76,37.66 24.89,34.8 23.88,34.8 22.61,33.53 22.61,28.83 23.37,28.07 34.16,28.07 36.82,25.41 | 36.83,25.4 36.82,25.41 | 36.82,25.41 LED4.A
D8
  Top 0.254: U2.12 28.56,37.7 25.15,34.29 24.13,34.29 23.24,33.4 23.24,29.08 23.62,28.7 38.62,28.7 LED5.A
D9  (via drill 0.51)
  Top 0.254: v23.62,5.59 25.91,3.3 33.78,3.3 36.58,6.1 36.58,10.67 39.62,13.72 62.61,13.72 63.63,14.73 63.63,19.56 61.09,22.1 61.09,27.3 62.48,28.7 63.5,28.7 64.01,29.21 U$5.AR | U2.13 29.36,37.32 v29.59,37.08
  Bottom 0.254: v23.62,5.59 16.64,5.59 8.64,13.59 8.64,33.15 13.08,37.59 29.08,37.59 v29.59,37.08
  pour Top: 104.73,42.1 104.73,41.7 106.24,41.7 106.24,42.1 105.76,42.1 105.76,43.82 105.4,43.82 105.37,43.81 105.31,43.77 105.25,43.75 105.22,43.73 105.19,43.72 105.15,43.71 105.12,43.7 105.08,43.68 105.04,43.67 105.01,43.66 104.97,43.65 104.92,43.65 104.84,43.63 104.84,43.32 105.27,43.32 105.27,42.1
D10  (via drill 0.51)
  Top 0.254: v22.61,4.57 24.38,2.79 34.04,2.79 37.08,5.84 37.08,10.41 39.75,13.08 62.86,13.08 64.39,14.61 64.39,19.56 66.93,22.1 66.93,27.18 65.11,29 U$5.AG | U2.14 30.16,40.2 30.48,39.88 v30.48,39.24
  Bottom 0.254: v22.61,4.57 16.89,4.57 8.13,13.34 8.13,33.4 12.83,38.1 29.46,38.1 30.48,39.12 v30.48,39.24 30.48,39.37
D11  (via drill 0.51)
  Top 0.254: U2.15 30.96,40.29 31.37,39.88 v31.37,37.08 | v18.41,39.5 18.67,39.24 v18.67,36.58 17.4,35.31 10.03,35.31 8.89,34.16 8.89,32.89 9.65,32.13 9.65,7.49 15.37,1.78 50.67,1.78 v57.78,8.89 | v64.01,31.88 63.25,31.88 62.99,31.62 62.99,30.22 U$5.AB
  Bottom 0.254: v18.67,36.58 19.05,36.96 28.32,36.96 29.21,36.07 30.35,36.07 v31.37,37.08 | J1.4 12.45,43.18 16.13,39.5 v18.41,39.5 | v57.78,8.89 64.01,15.11 v64.01,31.88
D12  (via drill 0.51)
  Top 0.254: 10.67,35.81 9.65,35.81 8.38,34.54 8.38,32.64 9.14,31.88 9.14,7.24 15.11,1.27 81.41,1.27 83.19,3.05 85.34,3.05 arc90 89.03,6.73 89.03,13.59 90.04,14.61 90.04,25.15 89.28,25.91 89.28,26.42 | 10.67,35.81 16,35.81 v16.38,36.2 | v32.38,38.48 31.88,38.99 31.88,40.13 31.76,40.25 U2.16 | J1.1 10.67,44.45 10.67,35.81 | 89.28,26.42 89.28,28.36 R23.2 | S5.A2 89.25,26.38 89.28,26.42
  Bottom 0.254: v16.38,36.2 16.89,35.69 19.81,35.69 20.57,36.45 28.07,36.45 28.96,35.56 31.24,35.56 32.38,36.7 v32.38,38.48
D13  (via drill 0.51)
  Top 0.254: U2.17 33.02,42.44 v33.02,41.15 34.8,41.15 R5.2
  Bottom 0.254: v33.02,41.15 29.46,41.15 26.92,38.61 15.88,38.61 12.57,41.91 10.67,41.91 J1.3
D14  (via drill 0.51)
  Top 0.254: U11.17 33.02,122.45 v33.02,121.16 34.8,121.16 R37.2
  Bottom 0.254: v33.02,121.16 29.46,121.16 26.92,118.62 15.88,118.62 12.57,121.92 10.67,121.92 J2.3
D15  (via drill 0.51)
  Top 0.254: U11.9 26.16,117.6 24.38,115.82 22.61,115.82 v22.23,115.44 | v23.88,106.05 24.51,105.41 26.67,105.41 26.67,105.43 LED11.A
  Bottom 0.254: v23.88,106.05 22.61,107.31 22.61,115.06 v22.23,115.44
D16  (via drill 0.51)
  Top 0.254: v23.62,85.6 25.91,83.31 33.78,83.31 36.58,86.11 36.58,90.68 39.62,93.73 62.61,93.73 63.63,94.74 63.63,99.57 61.09,102.11 61.09,107.31 62.48,108.71 63.5,108.71 64.01,109.22 U$1.AR | U11.13 29.36,117.33 v29.59,117.09
  Bottom 0.254: v23.62,85.6 16.64,85.6 8.64,93.6 8.64,113.16 13.08,117.6 29.08,117.6 v29.59,117.09
  pour Top: 104.73,122.11 104.73,121.71 106.24,121.71 106.24,122.11 105.76,122.11 105.76,123.83 105.4,123.83 105.37,123.82 105.31,123.78 105.25,123.76 105.22,123.74 105.19,123.73 105.15,123.72 105.12,123.71 105.08,123.69 105.04,123.68 105.01,123.67 104.97,123.66 104.92,123.66 104.84,123.64 104.84,123.33 105.27,123.33 105.27,122.11
D17
  Top 0.254: U11.10 26.96,117.63 24.64,115.32 23.62,115.32 21.97,113.67 21.97,108.58 23.62,106.93 30.24,106.93 LED12.A
D18  (via drill 0.51)
  Top 0.254: v22.61,84.58 24.38,82.8 34.04,82.8 37.08,85.85 37.08,90.42 39.75,93.09 62.86,93.09 64.39,94.61 64.39,99.57 66.93,102.11 66.93,107.19 65.11,109.01 U$1.AG | U11.14 30.16,120.21 30.48,119.89 v30.48,119.25
  Bottom 0.254: v22.61,84.58 16.89,84.58 8.13,93.34 8.13,113.41 12.83,118.11 29.46,118.11 30.48,119.13 v30.48,119.25 30.48,119.38
D19  (via drill 0.51)
  Top 0.254: U11.32 26.16,128.78 26.42,128.52 27.18,128.52 28.32,127.38 28.32,123.32 v28.19,123.19 | R38.2 13.21,93.73 v12.83,93.34 | v10.41,113.54 17.78,113.54 21.72,117.47 24.38,117.47 24.89,117.98 24.89,120.4 v24.38,120.9
  Bottom 0.254: v28.19,123.19 27.43,122.43 26.29,122.43 24.77,120.9 v24.38,120.9 | v12.83,93.34 11.94,93.34 9.14,96.14 9.14,112.27 v10.41,113.54
D20  (via drill 0.51)
  Top 0.254: U11.1 25.78,128.27 26.42,127.64 v26.8,127.64 | v102.11,92.71 102.11,87.63 100.08,85.6 R47.2
  Bottom 0.254: v26.8,127.64 27.94,127.64 38.86,138.56 38.86,145.41 41.53,148.08 74.93,148.08 80.52,153.67 100.84,153.67 102.11,152.4 v102.11,92.71
D21  (via drill 0.51)
  Top 0.254: U11.2 25.69,127.48 25.91,127.25 25.91,127 27.69,125.22 27.69,124.21 25.4,121.92 25.4,117.6 24.64,116.84 22.1,116.84 20.95,115.7 v20.95,114.43 | v21.34,107.7 21.59,107.44 21.59,105.43 | LED10.A 21.59,105.43 | 21.59,105.43 21.59,105.41
  Bottom 0.254: v21.34,107.7 22.1,108.46 22.1,113.28 v20.95,114.43
D22
  Top 0.254: U11.12 28.56,117.71 25.15,114.3 24.13,114.3 23.24,113.41 23.24,109.09 23.62,108.71 38.62,108.71 LED14.A
D23
  Top 0.254: U11.11 27.76,117.67 24.89,114.81 23.88,114.81 22.61,113.54 22.61,108.84 23.37,108.08 34.16,108.08 36.82,105.42 | 36.83,105.41 36.82,105.42 | 36.82,105.42 LED13.A
D24  (via drill 0.51)
  Top 0.254: 10.67,115.82 9.65,115.82 8.38,114.55 8.38,112.65 9.14,111.89 9.14,87.25 15.11,81.28 81.41,81.28 83.19,83.06 85.34,83.06 arc90 89.03,86.74 89.03,93.6 90.04,94.61 90.04,105.16 89.28,105.92 89.28,106.43 | 10.67,115.82 16,115.82 v16.38,116.2 | v32.38,118.49 31.88,119 31.88,120.14 31.76,120.26 U11.16 | J2.1 10.67,124.46 10.67,115.82 | 89.28,106.43 89.28,108.37 R39.2 | S8.A2 89.25,106.39 89.28,106.43
  Bottom 0.254: v16.38,116.2 16.89,115.7 19.81,115.7 20.57,116.46 28.07,116.46 28.96,115.57 31.24,115.57 32.38,116.71 v32.38,118.49
DTR
  Top 0.254: U5.2 34.94,57.77 35.05,57.66 35.05,56.64 34.8,56.39 32.51,56.39 31.88,55.75 C1.1
DTR1
  Top 0.254: U14.2 34.94,137.78 35.05,137.67 35.05,136.65 34.8,136.4 32.51,136.4 31.88,135.76 C20.1
GND  (via drill 0.51, 0.6)
  other vias: 28.19,63.75 29.72,59.44 22.35,60.71 24.38,56.9 20.07,44.7 41.4,19.43 89.28,46.48 85.6,49.91 92.84,52.2 85.73,59.82 36.83,42.55 35.05,42.55 21.08,3.43 78.99,4.45 76.84,2.41 46.1,42.42 36.2,57.66 33.4,55.12 38.61,70.61 20.07,41.15 35.05,46.23 30.99,46.74 88.27,22.35 15.37,4.45 12.57,7.24 12.83,11.56 19.43,13.08 14.99,68.83 95.25,7.37 62.74,22.23
  pour Top (isolate 0.305, rank 6): 112.27,76.2 6.86,76.2 6.86,0 112.27,0
  pour Bottom (isolate 0.305, rank 6): 112.27,76.2 6.86,76.2 6.86,0 112.27,0
GND1  (via drill 0.51, 0.6)
  other vias: 28.19,143.76 29.72,139.45 22.35,140.72 24.38,136.91 20.07,124.71 41.4,99.44 89.28,126.49 85.6,129.92 92.84,132.21 85.73,139.83 36.83,122.56 35.05,122.56 21.08,83.44 78.99,84.45 76.84,82.42 46.1,122.43 36.2,137.67 33.4,135.13 38.61,150.62 20.07,121.16 35.05,126.24 30.99,126.75 88.27,102.36 15.37,84.45 12.57,87.25 12.83,91.57 19.43,93.09 14.99,148.84 95.25,87.38 62.74,102.23
  pour Top (isolate 0.305, rank 6): 112.27,156.21 6.86,156.21 6.86,80.01 112.27,80.01
  pour Bottom (isolate 0.305, rank 6): 112.27,156.21 6.86,156.21 6.86,80.01 112.27,80.01
GRN
  Top 0.254: U$5.CG 65.11,26.04 R21.2
GRN1
  Top 0.254: U$1.CG 65.11,106.05 R32.2
N$1
  Top 0.254: Y1.1 23.18,44.13 23.84,43.47 U2.7
N$2
  Top 0.254: R5.1 34.8,38.08 D2.A
N$3
  Top 0.254: U2.8 23.87,42.67 22.93,41.73 Y1.3
N$4
  Top 0.254: Q2.1 91.36,6.35 Q1.3 91.36,3.04 R7.2
N$5
  Top 0.254: R13.1 LED6.A
N$6
  Top 0.254: R15.1 LED7.A
N$7
  Top 0.406: U7.1 38.29,69.02 38.61,68.71 38.61,67.18 38.55,67.12 | U7.3 38.55,67.12 | 38.55,67.12 38.55,65.86 F2.1
N$8
  Top 0.406: Q2.3 94.86,9.4 D5.C 96.64,7.62 JP2.1
N$9
  Top 0.254: LED3.C 30.24,22.45 R10.1
N$10
  Top 0.254: Q1.1 94.51,5.59 R6.1
N$11
  Top 0.254: LED4.C 35.32,22.45 R11.1
N$12
  Top 0.406: JP3.2 47.62,69.47 47.12,68.96 42.8,68.96 42.71,68.87 C11.1 42.4,69.02 U7.5
N$13
  Top 0.254: LED5.C 40.4,22.45 R12.1
N$14
  pour Top: 108.75,57.81 110.35,57.81 110.35,58.21 108.75,58.21 108.75,59.8 108.35,59.8 108.35,58.21 106.75,58.21 106.75,57.81 108.35,57.81 108.35,56.21 108.75,56.21
N$15
  Top 0.254: 16.98,5.72 16.89,5.72 S2.5 S2.2 16.98,11.46 R3.1
N$16
  Top 0.406: JP2.3 97.68,12.95 F1.2 95.13,11.43 D5.A
N$17
  Top 0.254: U9.1 86.87,60.58 87.76,59.69 91.57,59.69 92.33,58.93 93.26,58.93 R27.1 C14.1
N$18
  Top 0.254: LED1.C 20.08,22.34 21.59,20.83 21.65,20.83 R8.1
N$19
  pour Top: 68.12,74.36 68.13,74.25 68.12,74.24 68.12,74.22 68.11,74.21 68.1,74.19 68.04,74.16 67.98,74.16 67.96,74.17 67.94,74.17 67.86,74.21 67.84,74.23 67.82,74.24 67.8,74.26 67.78,74.27 67.76,74.29 67.74,74.3 67.73,74.32 67.71,74.34 67.68,74.4 67.67,74.41 67.66,74.43 67.66,74.5 67.67,74.52 67.67,74.53 67.68,74.55 67.69,74.56 67.7,74.58 67.75,74.63 67.78,74.64 67.82,74.66 67.85,74.67 67.87,74.67 67.89,74.68 67.95,74.68 67.97,74.67 67.99,74.67 67.98,74.68 67.96,74.69 67.94,74.71 67.91,74.73 67.87,74.75 67.83,74.76 67.79,74.78 67.74,74.79 67.68,74.8 67.63,74.81 67.57,74.81 67.51,74.8 67.45,74.78 67.38,74.75 67.32,74.71 67.27,74.67 67.23,74.62 67.19,74.58 67.17,74.53 67.15,74.49 67.13,74.39 67.15,74.29 67.17,74.25 67.19,74.2 67.22,74.15 67.3,74.05 67.35,74.01 67.44,73.92 67.47,73.88 67.49,73.83 67.51,73.79 67.51,73.68 67.49,73.64 67.47,73.61 67.44,73.58 67.38,73.54 67.34,73.52 67.3,73.51 67.2,73.51 67.17,73.52 67.14,73.52 67.12,73.53 67.09,73.54 67.07,73.56 67.05,73.57 67.04,73.59 67.01,73.62 66.99,73.66 66.99,73.73 67,73.75 67.01,73.76 67.01,73.78 67.02,73.79 67.04,73.8 67.06,73.82 67.08,73.83 67.1,73.85 67.11,73.85 67.13,73.86 67.14,73.87 67.15,73.87 67.14,73.88 67.12,73.88 67.1,73.89 66.94,73.89 66.82,73.85 66.79,73.83 66.77,73.82 66.74,73.8 66.7,73.76 66.68,73.73 66.66,73.71 66.64,73.67 66.63,73.64 66.61,73.6 66.6,73.56 66.6,73.52 66.59,73.47 66.59,73.36 66.62,71.92 66.63,71.92 66.63,71.93 66.65,71.95 66.66,71.97 66.68,71.99 66.7,72.02 66.75,72.07 66.77,72.1 66.8,72.14 66.86,72.2 66.95,72.32 66.99,72.36 67.02,72.4 67.06,72.43 67.09,72.47 67.12,72.5 67.14,72.53 67.17,72.56 67.2,72.58 67.23,72.61 67.26,72.63 67.28,72.64 67.31,72.66 67.35,72.67 67.38,72.67 67.42,72.68 67.6,72.68 67.66,72.69 67.73,72.7 67.91,72.76 67.97,72.79 68.02,72.82 68.12,72.9 68.16,72.94 68.21,72.98 68.29,73.08 68.32,73.13 68.38,73.24 68.43,73.34 68.46,73.44 68.48,73.55 68.49,73.65 68.49,73.74 68.47,73.84 68.45,73.92 68.43,74.01 68.39,74.08 68.36,74.15 68.31,74.21 68.27,74.27 68.22,74.31 68.17,74.34
N$20
  Top 0.254: R26.2 90.88,53.25 U8.5 92.96,54.48 93.34,54.86 C14.2
N$21
  Top 0.254: LED2.C 25.16,22.46 R9.1
N$22
  pour Top: 104.53,43.88 104.03,43.88 103.78,42.86 103.77,42.82 103.75,42.78 103.74,42.73 103.72,42.65 103.71,42.6 103.69,42.52 103.68,42.47 103.66,42.39 103.65,42.34 103.64,42.3 103.62,42.26 103.61,42.21 103.6,42.17 103.59,42.17 103.58,42.21 103.56,42.26 103.54,42.34 103.53,42.39 103.51,42.47 103.5,42.52 103.48,42.6 103.47,42.65 103.45,42.73 103.44,42.78 103.43,42.82 103.41,42.86 103.15,43.88 102.63,43.88 103.29,41.7 103.88,41.7
N$23
  Top 0.254: U8.6 89.66,55.75 89.28,55.37 89.28,51.82 88.94,51.47 R24.1 87.34,51.47 87,51.82 87,52.83 86.65,53.17 R25.1
N$24
  Top 0.254: U8.1 U8.2 84.33,57.02 83.44,56.13 83.44,50.55 86.37,47.62 D4.A
N$25
  Top 0.254: LED10.C 20.08,102.35 21.59,100.84 21.65,100.84 R16.1
N$26
  Top 0.254: R24.2 88.27,55.63 | 88.27,55.63 88.27,56.39 88.9,57.02 U8.7 | U8.3 85.65,55.63 88.27,55.63
N$27
  Top 0.254: LED11.C 25.16,102.47 R18.1
N$28
  Top 0.254: R37.1 34.8,118.09 D8.A
N$29
  Top 0.254: Y2.1 23.18,124.14 23.84,123.48 U11.7
N$31
  Top 0.254: U11.8 23.87,122.68 22.93,121.74 Y2.3
N$32
  Top 0.254: D3.C 17.93,139.61 R34.1
N$33
  Top 0.254: D1.C 17.93,59.6 R1.1
N$34
  Top 0.254: LED12.C 30.24,102.46 R20.1
N$35
  Top 0.254: LED13.C 35.32,102.46 R28.1
N$36
  Top 0.254: LED14.C 40.4,102.46 R29.1
N$37
  Top 0.254: 16.98,85.73 16.89,85.73 S4.5 S4.2 16.98,91.47 R38.1
N$38
  Top 0.254: R40.1 LED8.A
N$39
  Top 0.254: R41.1 LED9.A
N$40
  Top 0.254: U15.1 86.87,140.59 87.76,139.7 91.57,139.7 92.33,138.94 93.26,138.94 R42.1 C25.1
N$41
  Top 0.254: R43.2 90.88,133.26 U16.5 92.96,134.49 93.34,134.87 C25.2
N$42
  Top 0.254: U16.6 89.66,135.76 89.28,135.38 89.28,131.83 88.94,131.48 R44.1 87.34,131.48 87,131.83 87,132.84 86.65,133.18 R45.1
N$43
  Top 0.254: U16.1 U16.2 84.33,137.03 83.44,136.14 83.44,130.56 86.37,127.63 D6.A
N$44
  Top 0.254: R44.2 88.27,135.64 | 88.27,135.64 88.27,136.4 88.9,137.03 U16.7 | U16.3 85.65,135.64 88.27,135.64
N$45
  Top 0.406: Q3.3 94.86,89.41 D7.C 96.64,87.63 JP5.1
N$46
  Top 0.254: Q3.1 91.36,86.36 Q4.3 91.36,83.05 R48.2
N$47
  Top 0.254: Q4.1 94.51,85.6 R47.1
N$48
  Top 0.406: JP6.2 47.62,149.48 47.12,148.97 42.8,148.97 42.71,148.88 C26.1 42.4,149.03 U17.5
N$49
  Top 0.406: U17.1 38.29,149.03 38.61,148.72 38.61,147.19 38.55,147.13 | U17.3 38.55,147.13 | 38.55,147.13 38.55,145.87 F4.1
N$50
  Top 0.406: JP5.3 97.68,92.96 F3.2 95.13,91.44 D7.A
N$51
  pour Top: 108.75,137.82 110.35,137.82 110.35,138.22 108.75,138.22 108.75,139.81 108.35,139.81 108.35,138.22 106.75,138.22 106.75,137.82 108.35,137.82 108.35,136.22 108.75,136.22
N$52
  pour Top: 68.12,154.37 68.13,154.26 68.12,154.25 68.12,154.23 68.11,154.22 68.1,154.2 68.04,154.17 67.98,154.17 67.96,154.18 67.94,154.18 67.86,154.22 67.84,154.24 67.82,154.25 67.8,154.27 67.78,154.28 67.76,154.3 67.74,154.31 67.73,154.33 67.71,154.35 67.68,154.41 67.67,154.42 67.66,154.44 67.66,154.51 67.67,154.53 67.67,154.54 67.68,154.56 67.69,154.57 67.7,154.59 67.75,154.64 67.78,154.65 67.82,154.67 67.85,154.68 67.87,154.68 67.89,154.69 67.95,154.69 67.97,154.68 67.99,154.68 67.98,154.69 67.96,154.7 67.94,154.72 67.91,154.74 67.87,154.76 67.83,154.77 67.79,154.79 67.74,154.8 67.68,154.81 67.63,154.82 67.57,154.82 67.51,154.81 67.45,154.79 67.38,154.76 67.32,154.72 67.27,154.68 67.23,154.63 67.19,154.59 67.17,154.54 67.15,154.5 67.13,154.4 67.15,154.3 67.17,154.26 67.19,154.21 67.22,154.16 67.3,154.06 67.35,154.02 67.44,153.93 67.47,153.89 67.49,153.84 67.51,153.8 67.51,153.69 67.49,153.65 67.47,153.62 67.44,153.59 67.38,153.55 67.34,153.53 67.3,153.52 67.2,153.52 67.17,153.53 67.14,153.53 67.12,153.54 67.09,153.55 67.07,153.57 67.05,153.58 67.04,153.6 67.01,153.63 66.99,153.67 66.99,153.74 67,153.76 67.01,153.77 67.01,153.79 67.02,153.8 67.04,153.81 67.06,153.83 67.08,153.84 67.1,153.86 67.11,153.86 67.13,153.87 67.14,153.88 67.15,153.88 67.14,153.89 67.12,153.89 67.1,153.9 66.94,153.9 66.82,153.86 66.79,153.84 66.77,153.83 66.74,153.81 66.7,153.77 66.68,153.74 66.66,153.72 66.64,153.68 66.63,153.65 66.61,153.61 66.6,153.57 66.6,153.53 66.59,153.48 66.59,153.37 66.62,151.93 66.63,151.93 66.63,151.94 66.65,151.96 66.66,151.98 66.68,152 66.7,152.03 66.75,152.08 66.77,152.11 66.8,152.15 66.86,152.21 66.95,152.33 66.99,152.37 67.02,152.41 67.06,152.44 67.09,152.48 67.12,152.51 67.14,152.54 67.17,152.57 67.2,152.59 67.23,152.62 67.26,152.64 67.28,152.65 67.31,152.67 67.35,152.68 67.38,152.68 67.42,152.69 67.6,152.69 67.66,152.7 67.73,152.71 67.91,152.77 67.97,152.8 68.02,152.83 68.12,152.91 68.16,152.95 68.21,152.99 68.29,153.09 68.32,153.14 68.38,153.25 68.43,153.35 68.46,153.45 68.48,153.56 68.49,153.66 68.49,153.75 68.47,153.85 68.45,153.93 68.43,154.02 68.39,154.09 68.36,154.16 68.31,154.22 68.27,154.28 68.22,154.32 68.17,154.35
N$53
  pour Top: 104.53,123.89 104.03,123.89 103.78,122.87 103.77,122.83 103.75,122.79 103.74,122.74 103.72,122.66 103.71,122.61 103.69,122.53 103.68,122.48 103.66,122.4 103.65,122.35 103.64,122.31 103.62,122.27 103.61,122.22 103.6,122.18 103.59,122.18 103.58,122.22 103.56,122.27 103.54,122.35 103.53,122.4 103.51,122.48 103.5,122.53 103.48,122.61 103.47,122.66 103.45,122.74 103.44,122.79 103.43,122.83 103.41,122.87 103.15,123.89 102.63,123.89 103.29,121.71 103.88,121.71
PROG
  Top 0.254: U1.5 14.46,62.93 R4.2
PROG1
  Top 0.254: U12.5 14.46,142.94 R35.2
RED
  Top 0.254: U$5.CR R19.2
RED1
  Top 0.254: U$1.CR R31.2
RST  (via drill 0.51)
  Top 0.254: U2.29 28.56,50.91 v30.48,52.83 30.9,53.25 C1.2 | S1.1 18.8,49.78 | 18.8,49.78 17.87,49.78 R2.1 17.78,49.87 v17.78,48.64 | 18.8,49.78 v24.89,49.78
  Bottom 0.254: v24.89,49.78 27.05,51.94 29.59,51.94 v30.48,52.83 | J1.5 8,42.04 8,46.86 8.38,47.24 16.38,47.24 v17.78,48.64
RST1  (via drill 0.51)
  Top 0.254: U11.29 28.56,130.92 v30.48,132.84 30.9,133.26 C20.2 | S7.1 18.8,129.79 | 18.8,129.79 17.87,129.79 R36.1 17.78,129.88 v17.78,128.65 | 18.8,129.79 v24.89,129.79
  Bottom 0.254: v24.89,129.79 27.05,131.95 29.59,131.95 v30.48,132.84 | J2.5 8,122.05 8,126.87 8.38,127.25 16.38,127.25 v17.78,128.65
RXD
  Top 0.203: U5.1 32.35,57.12 30.86,55.63 30.86,54.61 29.46,53.21 29.46,52.58 27.76,50.87 U2.30
RXD1
  Top 0.203: U14.1 32.35,137.13 30.86,135.64 30.86,134.62 29.46,133.22 29.46,132.59 27.76,130.88 U11.30
RXLED
  Top 0.254: LED7.C 27.17,53.33 28.7,54.86 28.7,60.2 27.88,61.02 U5.22
RXLED1
  Top 0.254: LED9.C 27.17,133.34 28.7,134.87 28.7,140.21 27.88,141.03 U14.22
STAT
  Top 0.406: U1.1 19.11,62.93 19.68,62.36 R1.2
STAT1
  Top 0.406: U12.1 19.11,142.94 19.68,142.37 R34.2
TXD  (via drill 0.51)
  Top 0.203: U2.31 26.96,50.83 28.96,52.83 28.96,53.47 30.35,54.86 30.35,56.52 v31.88,58.04 | v32.13,60.33 32.74,59.72 U5.5
  Bottom 0.203: v31.88,58.04 31.88,60.07 v32.13,60.33
TXD1  (via drill 0.51)
  Top 0.203: U11.31 26.96,130.84 28.96,132.84 28.96,133.48 30.35,134.87 30.35,136.53 v31.88,138.05 | v32.13,140.34 32.74,139.73 U14.5
  Bottom 0.203: v31.88,138.05 31.88,140.08 v32.13,140.34
TXLED
  Top 0.254: LED6.C 28.07,54.99 28.19,55.12 28.19,59.94 27.77,60.37 U5.23
TXLED1
  Top 0.254: LED8.C 28.07,135 28.19,135.13 28.19,139.95 27.77,140.38 U14.23
USB_D+
  Top 0.254: U5.15 28.48,65.57 30.23,67.31 X1.D+
USB_D+1
  Top 0.254: U14.15 28.48,145.58 30.23,147.32 X2.D+
USB_D-
  Top 0.254: U5.16 28.59,64.92 30.99,67.31 30.99,68.96 X1.D-
USB_D-1
  Top 0.254: U14.16 28.59,144.93 30.99,147.32 30.99,148.97 X2.D-
VBATT  (via drill 0.51, 0.6)
  Top 0.406: S3.1 S3.4 13.04,52.49 v12.57,52.96
  Bottom 0.406: v12.57,52.96 12.57,59.05 v20.07,66.55
  other vias: 20.07,68.83
  pour Top (isolate 0.305, rank 2): 18.29,64.77 21.34,64.77 21.34,69.34 18.29,69.34
VBATT1  (via drill 0.51, 0.6)
  Top 0.406: S6.1 S6.4 13.04,132.5 v12.57,132.97
  Bottom 0.406: v12.57,132.97 12.57,139.06 v20.07,146.56
  other vias: 20.07,148.84
  pour Top (isolate 0.305, rank 2): 18.29,144.78 21.34,144.78 21.34,149.35 18.29,149.35
VCC  (via drill 0.51)
  Top 0.254: C6.1 21.99,45.87 U2.4 25.76,45.87 25.91,45.72 25.91,44.96 | U2.6 25.72,44.27 25.91,44.45 25.91,44.96 | 31.75,44.7 32.11,45.07 U2.20 34.44,45.07 35.05,44.45 C4.1 | U2.18 31.97,43.47 31.75,43.69 31.75,44.7 | v30.99,44.7 31.75,44.7 | v26.67,44.96 25.91,44.96 | v46.1,40.89 46.42,40.57 U4.1 44.85,39.39 C8.1 | R27.2 92.24,60.54 v92.08,60.71 | U8.8 88.39,58.29 v88.27,58.17 | v18.29,10.16 19.39,10.16 | v100.33,10.16 100.04,9.87 | C3.A 35.81,50.8 | v64.39,56.9 64.39,56.12 U6.C | R2.2 16.04,50.84 16.26,51.05 v19.81,51.05 | R7.1 v94.74,2.79 | v86.23,23.37 86.23,22.05 S5.B2 | 19.39,10.16 S2.3 | 19.39,10.16 S2.6
  Top 0.305: 39.24,52.32 39.24,60.96 38.1,62.1 F2.2
  Top 0.406: S3.5 S3.2 | 39.24,52.32 v38.86,51.94 | Q2.2 93.64,10.16 JP2.2
  Top 0.61: v19.81,53.72 19.81,54.86 19.74,54.94 arc-45 S3.5 | v33.02,49.78 34.04,50.8 35.81,50.8 | v100.33,10.16 JP2.2 | v16.89,42.29 16.89,38.35 v15.24,36.7
  Bottom 0.254: v46.1,40.89 46.1,33.78 | v64.39,56.9 64.39,41.4 | v92.08,60.71 90.81,60.71 v88.27,58.17 88.27,33.78 89.54,33.78 89.79,33.53 89.79,26.92 v86.23,23.37 | v18.29,10.16 18.29,14.48 18.03,14.48 | J1.2 16.76,45.72 16.89,45.85 | v94.74,2.79 100.33,8.38 v100.33,10.16 | 64.01,41.4 63.75,41.4
  Bottom 0.406: v38.86,51.94 36.7,49.78 v33.02,49.78
  Bottom 0.61: v30.99,44.7 26.92,44.7 v26.67,44.96 25.53,43.81 19.81,49.4 | 88.27,33.78 79.69,33.78 arc-45 74.38,35.98 71.16,39.2 arc45 65.85,41.4 64.39,41.4 63.75,41.4 62.16,41.4 arc45 56.86,39.2 53.63,35.98 arc-45 48.33,33.78 46.1,33.78 41.91,33.78 v30.99,44.7 | v100.33,10.16 90.04,10.16 88.27,8.38 88.27,7.11 arc-90 84.45,3.05 78.25,3.05 U3.3 70.31,3.05 28.96,3.05 arc-90 25.15,6.86 25.15,11.68 arc90 22.35,14.48 18.03,14.48 13.72,14.48 arc-90 9.91,18.29 9.91,31.37 v15.24,36.7 | v33.02,49.78 33.02,46.74 v30.99,44.7 | v19.81,53.72 v19.81,51.05 19.81,49.4 | 19.81,49.4 20.07,49.15 20.07,49.02 16.89,45.85 v16.89,42.29
VCC1  (via drill 0.51)
  Top 0.254: C19.1 21.99,125.88 U11.4 25.76,125.88 25.91,125.73 25.91,124.97 | U11.6 25.72,124.28 25.91,124.46 25.91,124.97 | 31.75,124.71 32.11,125.08 U11.20 34.44,125.08 35.05,124.46 C21.1 | U11.18 31.97,123.48 31.75,123.7 31.75,124.71 | v30.99,124.71 31.75,124.71 | v26.67,124.97 25.91,124.97 | v46.1,120.9 46.42,120.58 U10.1 44.85,119.4 C15.1 | R42.2 92.24,140.55 v92.08,140.72 | U16.8 88.39,138.3 v88.27,138.18 | v18.29,90.17 19.39,90.17 | v100.33,90.17 100.04,89.88 | C16.A 35.81,130.81 | v64.39,136.91 64.39,136.13 U18.C | R36.2 16.04,130.85 16.26,131.06 v19.81,131.06 | R48.1 v94.74,82.8 | v86.23,103.38 86.23,102.06 S8.B2 | 19.39,90.17 S4.3 | 19.39,90.17 S4.6
  Top 0.305: 39.24,132.33 39.24,140.97 38.1,142.11 F4.2
  Top 0.406: S6.5 S6.2 | 39.24,132.33 v38.86,131.95 | Q3.2 93.64,90.17 JP5.2
  Top 0.61: v19.81,133.73 19.81,134.87 19.74,134.95 arc-45 S6.5 | v33.02,129.79 34.04,130.81 35.81,130.81 | v100.33,90.17 JP5.2 | v16.89,122.3 16.89,118.36 v15.24,116.71
  Bottom 0.254: v46.1,120.9 46.1,113.79 | v64.39,136.91 64.39,121.41 | v92.08,140.72 90.81,140.72 v88.27,138.18 88.27,113.79 89.54,113.79 89.79,113.54 89.79,106.93 v86.23,103.38 | v18.29,90.17 18.29,94.49 18.03,94.49 | J2.2 16.76,125.73 16.89,125.86 | v94.74,82.8 100.33,88.39 v100.33,90.17 | 64.01,121.41 63.75,121.41
  Bottom 0.406: v38.86,131.95 36.7,129.79 v33.02,129.79
  Bottom 0.61: v30.99,124.71 26.92,124.71 v26.67,124.97 25.53,123.83 19.81,129.41 | 88.27,113.79 79.69,113.79 arc-45 74.38,115.99 71.16,119.22 arc45 65.85,121.41 64.39,121.41 63.75,121.41 62.16,121.41 arc45 56.86,119.22 53.63,115.99 arc-45 48.33,113.79 46.1,113.79 41.91,113.79 v30.99,124.71 | v100.33,90.17 90.04,90.17 88.27,88.39 88.27,87.12 arc-90 84.45,83.06 78.25,83.06 U13.3 70.31,83.06 28.96,83.06 arc-90 25.15,86.87 25.15,91.69 arc90 22.35,94.49 18.03,94.49 13.72,94.49 arc-90 9.91,98.3 9.91,111.38 v15.24,116.71 | v33.02,129.79 33.02,126.75 v30.99,124.71 | v19.81,133.73 v19.81,131.06 19.81,129.41 | 19.81,129.41 20.07,129.16 20.07,129.03 16.89,125.86 v16.89,122.3

## Text on the board
Bottom: v10 | v10
Dimension: Route Out | Route Out | Route Out | Route Out | Route Out | Route Out | Route Out | Route Out | Route Out | Route Out | Route Out | Route Out | Route Out | Route Out | Route Out | Route Out | Route Out | Route Out | Route Out | Route Out | Route Out | Route Out | Route Out | Route Out | Route Out | Route Out | Route Out | Route Out | Route Out | Route Out | Route Out | Route Out | Route Out
tPlace: GND | VCC | OUT | GND | VCC | OUT